# Altium PCB main_board4.PcbDoc
Units mm, origin at the board's own origin, x right, y up, seen from the top; angles counter-clockwise.
Board outline 147.7 x 56.39 mm, 2 copper layers (Top Layer, Bottom Layer); 82 components, 65 nets, 336 pads, 51 vias.
Unrouted connection lines stored in the file: 1.
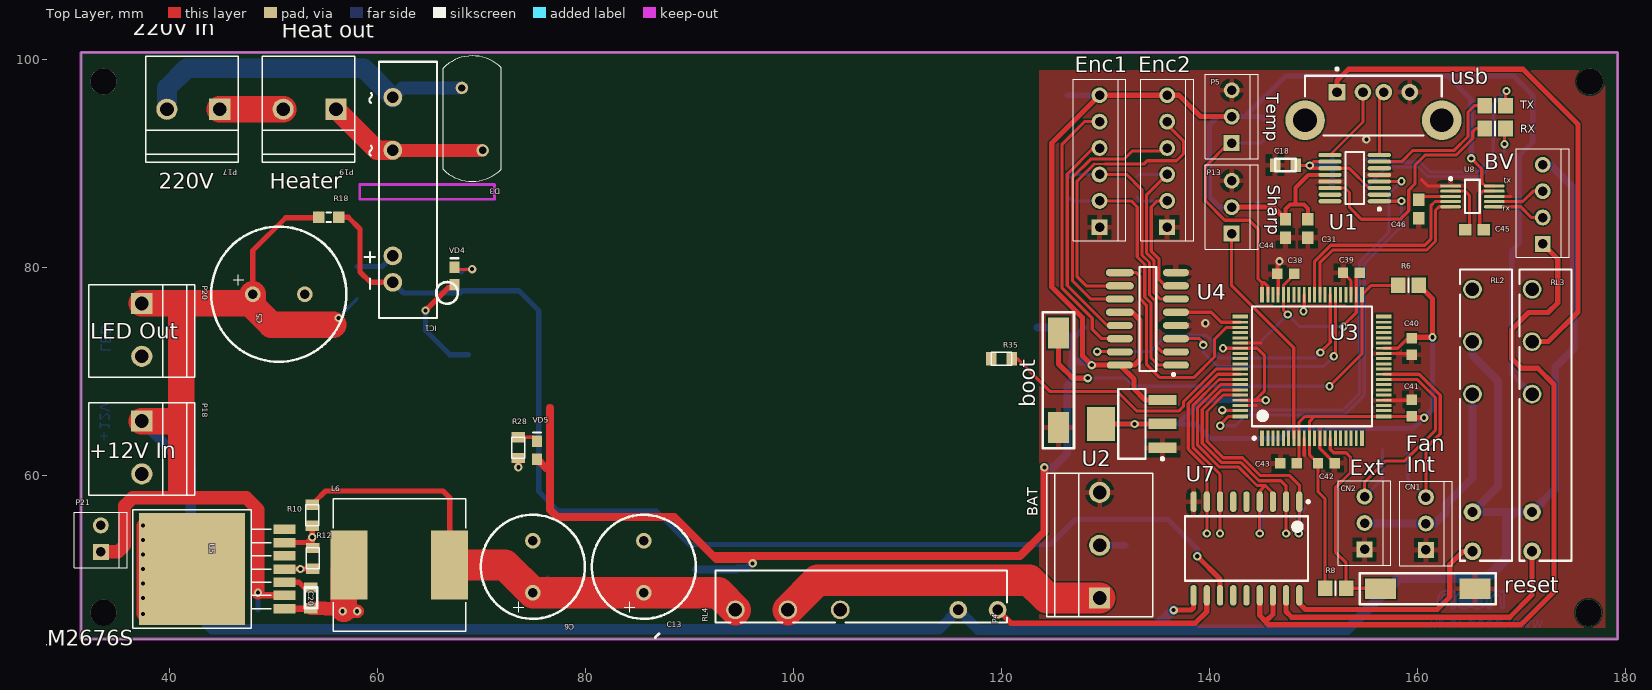
[diagram p0: Top Layer view]
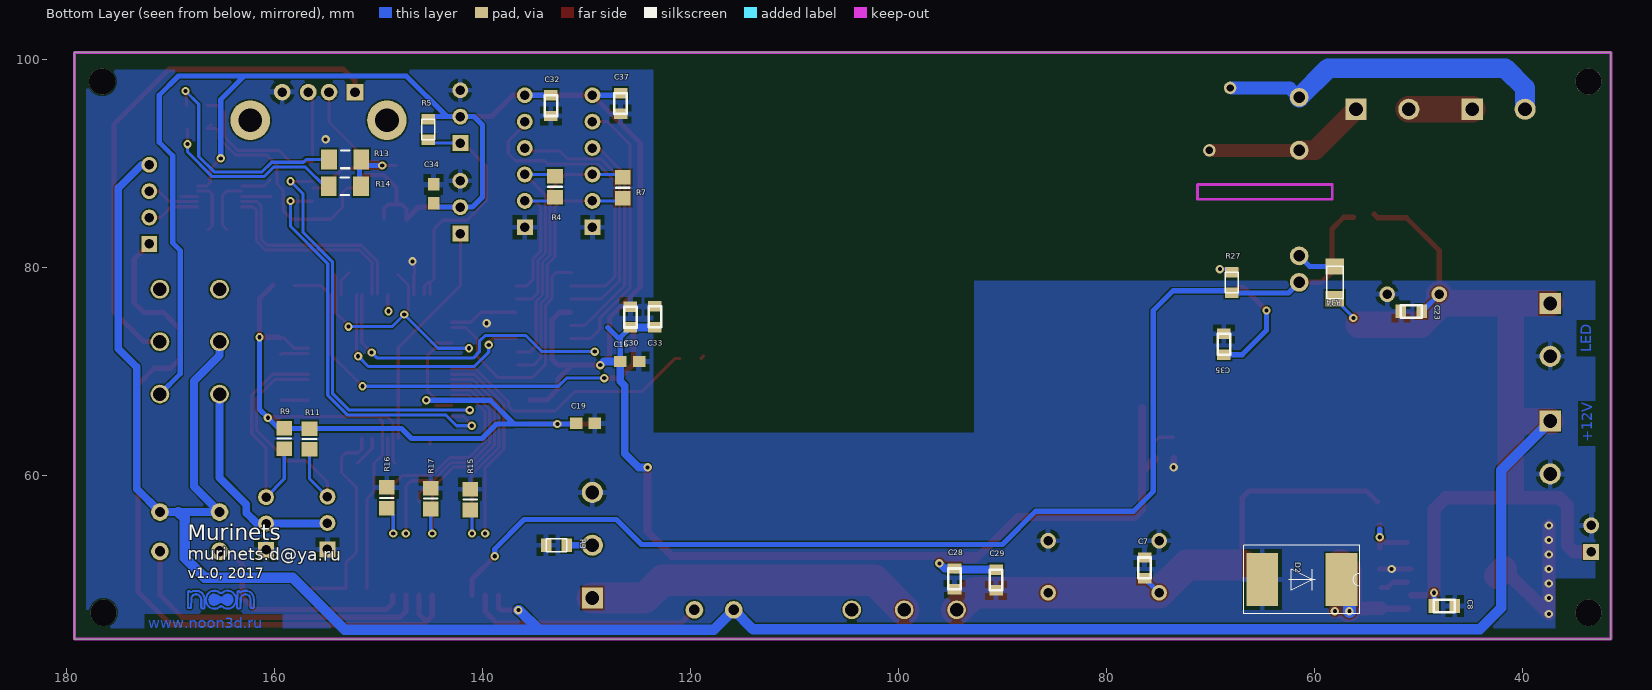
[diagram p1: Bottom Layer view, seen from below]

## Layer stack, top to bottom
Top Solder: solder mask 0.0102, Solder Resist, Dk 3.5
Top Layer: signal copper 0.0356
Dielectric 1: dielectric 0.32, FR-4, Dk 4.8
Bottom Layer: signal copper 0.0356
Bottom Solder: solder mask 0.0102, Solder Resist, Dk 3.5

## Board outline
31.496,44.323 31.496,100.711 179.197,100.711 179.197,44.323

## Design rules (kind name [scope] priority, off if disabled: settings)
Clearance [All] p1: gap=0.15 ignorepadtopadclearanceinfootprint=FALSE
PolygonConnect [IsPad And InNet('GND')] p1: connectstyle=Relief reliefconductorwidth=0.508 reliefentries=4 polygonreliefangle="90 Angle" airgapwidth=0.381
PolygonConnect ViaCon [IsVia And InNet('GND')] p2: connectstyle=Direct reliefconductorwidth=0.508 reliefentries=4 polygonreliefangle="90 Angle" airgapwidth=0.381
RoutingVias [All] p1: holewidth=0.6 width=1.15 viastyle="Through Hole" minholewidth=0.6 minwidth=1.15 maxholewidth=0.8 maxwidth=1.3 useviatemplates=TRUE viatemplateguid#1={5399A165-F482-44B8-8C10-10F574C55520} viatemplatename#1=v08h40
SolderMaskExpansion [All] p1: expansion=0.102
Width [All] p1: maxlimit=5.81 minlimit=0.2 preferedwidth=0.305 minimp=50.000000 maximp=50.000000 favimp=50.000000
30 further rules are at their usual default settings.

## Components (designator, comment, footprint, x,y, rotation, side; value= is the part's Value field where it differs from the comment)
boot "chip button" "BUTTON SMD" 125.45,67.65 r90 top
BV "wf-4" WF-4 172,82.3 r90 top
C5 "1000uF" CAP+_D13_dip 48.006,77.47 r90 top
C6 "470uF" CAP+_D10_dip 74.93,48.768 r180 top
C7 "0,1 мк" Cap_0805 76.327,50.165 r90 bottom
C8 "0.47" Cap_0805 48.514,47.498 r180 bottom
C13 "470uF" CAP+_D10_dip 85.598,48.768 r180 top
C16 "Cap" CAPC1608M 125.825,71 r180 bottom value=1uF
C18 "0.1" Cap_0805 148.275,89.875 r180 top
C19 "Cap" CAPC1608M 130.075,65.05 r180 bottom value=1uF
C20 "10n" Cap_0805 53.594,49.276 r270 top
C23 "0,1 мк" Cap_0805 51.689,75.819 r180 bottom
C28 "0.1" Cap_0805 94.6,49.1 r90 bottom
C29 "0.1" Cap_0805 90.6,49 r90 bottom
C30 "0.1" Cap_0805 125.75,76.275 r270 bottom
C31 "0.1" CAPC1608M 149.425,83.775 r90 top
C32 "0.1" Cap_0805 133.4,94.6 r90 bottom
C33 "0.1" Cap_0805 123.4,76.3 r270 bottom
C34 "Cap" CAPC1608M 144.675,87.125 r90 bottom value=1uF
C35 "0.1" Cap_0805 68.707,73.66 r270 bottom
C37 "0.1" Cap_0805 126.7,94.8 r90 bottom
C38 "p" CAPC1608N 147.3,79.425 r0 top value=100nF
C39 "p" CAPC1608N 153.6,79.525 r0 top value=100nF
C40 "p" CAPC1608N 159.4,72.45 r90 top value=100nF
C41 "p" CAPC1608N 159.4,66.525 r270 top value=100nF
C42 "p" CAPC1608N 151.2,61.225 r180 top value=100nF
C43 "p" CAPC1608N 147.575,61.225 r0 top value=100nF
C44 "0.1" CAPC1608M 147.275,83.775 r90 top
C45 "0.1" CAPC1608M 165.45,83.675 r180 top
C46 "p" CAPC1608M 160.075,85.65 r270 top value=100nF
CN1 "3-pin" wf-3 160.775,52.885 r90 top
CN2 "3-pin" wf-3 154.875,52.935 r90 top
D2 "MBRS330" MBRS3 65.024,50.038 r180 bottom
D3 "390V" Var_130 68.1,97.3 r270 top
Enc1 "6-pin" WF-6 129.4,83.9 r90 top (schematic designator enc1)
Enc2 "6-pin" WF-6 135.9,83.9 r90 top (schematic designator enc2)
IC1 "S202T" CRYDOM_LC 61.468,87.503 r270 top
L6 "DR-PM12651S" PM12651 62.103,51.435 r0 top value=22uH
P4 "MPW3" "MPW-3 - duplicate" 129.413,48.26 r90 top
P5 "WF-3" WF-3 142.1,92 r90 top
P13 "WF-3" WF-3 142.1,83.3 r90 top
P17 "MPW-2" MPW-2 44.831,95.25 r180 top
P18 "MPW-2" MPW-2 37.338,65.278 r270 top
P19 "MPW-2" MPW-2 56.007,95.25 r180 top
P20 "MPW-2" MPW-2 37.338,76.581 r270 top
P21 "WF2" WF2 33.401,52.705 r0 top
R3 "2k4" Res_0805 133.858,53.34 r180 bottom
R4 "100" RESC2012M 133,87.8 r90 bottom
R5 "10k" Res_0805 145.2,92.3 r90 bottom
R6 "510" RESC2012M 159.1,78.325 r0 top
R7 "100" RESC2012M 126.5,87.7 r90 bottom
R8 "510" RESC2012M 152.1,49.2 r180 top
R9 "100" RESC2012M 159.025,63.6 r90 bottom
R10 "2k4" Res_0805 53.725,55.225 r90 top
R11 "100" RESC2012M 156.6,63.55 r90 bottom
R12 "1k" Res_0805 53.75,51.075 r90 top
R13 "Res2" RESC3216M 153.175,90.425 r0 bottom value=1K
R14 "Res2" RESC3216M 153.2,87.85 r0 bottom value=1K
R15 "10k" RESC2012M 141.15,57.725 r90 bottom
R16 "10k" RESC2012M 149.175,57.9 r90 bottom
R17 "10k" RESC2012M 144.95,57.825 r90 bottom
R18 "4.7K" RESC1608M 55.3,84.875 r180 top
R27 "510" Res_0805 67.945,77.597 r90 bottom
R28 "510" Res_0805 73.533,61.722 r90 top
R34 "510" Res_1206 58.039,80.137 r270 bottom
R35 "10k" Res_0805 120.975,71.275 r180 top
reset "chip button" "BUTTON SMD" 162.5,49.15 r180 top
RL2 "5VDC" REL_TYCO-SCHRACK_SNR 165.25,65.85 r90 top
RL3 "5VDC" REL_TYCO-SCHRACK_SNR 170.975,65.85 r90 top
RL4 "5VDC" REL_TYCO-SCHRACK_SNR 106.5,47.125 r180 top
RX "led" RESC2012M 167.425,93.4 r0 top
TX "led" RESC2012M 167.425,95.6 r0 top
U1 "FT230X" SOP635P600-16N 153.925,88.625 r180 top
U2 "ADP3338" SOT223-4M 132.5,65 r180 top
U3 "LPC1758FBD80" SOT315-1_V 149.825,70.525 r90 top
U4 "SN65C1167" "SOIC127P600-16M - INCREASE WIDTH" 134.05,75.1 r180 top
U5 "LM2678S" TO263-7 42.164,51.054 r0 top
U7 "ULN2803A" SOIC127P1030-18L 143.525,53.025 r270 top
U8 "ADM101E" TSSOP50P490-10AM 165.25,86.875 r0 top
usb "USBB-1J" USB2.5-2V4A 155.725,92.71 r270 top
VD4 "*" CD1608-0603 67.4,79.225 r90 top
VD5 "*" CD1608-0603 75.325,62.475 r90 top

## Footprints (in the part's own frame and the unit in brackets; to place one, negate y for a bottom-side part, rotate by r counter-clockwise, add the part's x,y. Pads: shape width x height; smd on the part's side, far side on the other; paste and mask are expansions set on the pad)
"BUTTON SMD" [mm]
  rect 3x2 smd: 1(6.1,0) 2(-3,0)
  silkscreen extent -5,-1.5 8.1,1.5, body extent -5,-1.5 8.1,1.5, height 5
CAP+_D10_dip [mm]
  round 1.5 hole 0.9: 1(0,0) 2(0,-5)
  silkscreen extent -5,-7.5 5,2.5
CAP+_D13_dip [mm]
  round 1.5 hole 0.9: 1(0,0) 2(0,-5)
  silkscreen extent -6.5,-9 6.5,4
Cap_0805 [mm] "Type 0805"
  rect 1x1.3 smd: 1(0,0) 2(2,0)
  silkscreen extent 0,-0.6 2,0.6
CAPC1608M [mm] "Chip Capacitor, Body 1.6x0.8mm, IPC Low Density"
  rect 1.2x1.1 smd: 1(-0.9,0) 2(0.9,0)
  body extent -0.87,-0.48 0.87,0.48, height 0.85
CAPC1608N [mm] "Chip Capacitor, Body 1.6x0.8mm, IPC Medium Density"
  rect 1x1 smd: 1(-0.8,0) 2(0.8,0)
  body extent -0.87,-0.48 0.87,0.48, height 0.85
CD1608-0603 [mm] "Chip Diode; Body 1.6 x 0.8 mm (LxW typ)"
  rect 1.1x1 smd: 1(-0.85,0) 2(0.85,0)
  silkscreen extent 1.7,-0.4 1.7,0.4
CRYDOM_LC [mm] "CRYDOM LC Serie, 4 Leads, Body 24.1mm x 5.1mm, Mini-SIP SSR (Solid State Relay)"
  round 1.8 hole 1.1: 1(-8.89,0) 2(-3.81,0) 3(6.35,0) 4(8.89,0)
  silkscreen extent -12.32,-2.7 12.32,4.25, body extent -12.31,-1.33 12.32,4.25, height 13.2
MBRS3 [mil]
  rect 120x200 smd: 1(0,0) 2(300,0)
  silkscreen extent -70,-130 370,130
MPW-2 [mil]
  rect 80x80 hole 52: 1(0,0)
  round 80 hole 52: 2(200,0)
  silkscreen extent -70,-200 280,200
"MPW-3 - duplicate" [mil]
  rect 80x80 hole 52: 1(0,0)
  round 80 hole 52: 2(200,0) 3(400,0)
  silkscreen extent -70,-200 472,200
PM12651 [mil]
  rect 140x260 smd: 1(-190,0) 2(190,0)
  silkscreen extent -250,-250 250,250
REL_TYCO-SCHRACK_SNR [mm] "5 Leads, Body 28.0 x 5mm, Slim PCB Relay SNR Serie"
  round 1.8 hole 1.3: 11(7.06,0) 12(2.02,0) 14(12.1,0)
  round 1.7 hole 1: A1(-13.1,0) A2(-9.32,0)
  silkscreen extent -14,-3.8 14,1.2, body extent -14,-3.8 14,1.2, height 15
Res_0805 [mm] "Type 0805"
  rect 1x1.3 smd: 1(0,0) 2(2,0)
  silkscreen extent 0,-0.63 2,0.63
Res_1206 [mm] "Type 1206"
  rect 1.5x1.8 smd: 1(0,0) 2(3.1,0)
  silkscreen extent 0,-0.8 3.1,0.8
RESC1608M [mm] "Chip Resistor, Body 1.6x0.8mm, IPC Low Density"
  rect 1.1x1.1 smd: 1(-0.95,0) 2(0.95,0)
  silkscreen extent -0.2,-0.45 0.2,0.45, body extent -0.85,-0.48 0.85,0.48, height 0.6
RESC2012M [mm] "Chip Resistor, Body 2.0x1.3mm, IPC Low Density"
  rect 1.4x1.5 smd: 1(-1,0) 2(1,0)
  silkscreen extent 0,-0.65 0,0.65, body extent -1.07,-0.7 1.07,0.7, height 0.65
RESC3216M [mm] "Chip Resistor, Body 3.2x1.6mm, IPC Low Density"
  rect 1.5x1.9 smd: 1(-1.55,0) 2(1.55,0)
  silkscreen extent -0.4,-0.85 0.4,0.85, body extent -1.68,-0.87 1.68,0.87, height 0.71
"SOIC127P600-16M - INCREASE WIDTH" [mm] "SOIC, 16-Leads, Body 9.9x3.9mm, Pitch 1.27mm, IPC Low Density"
  oval 2.5x0.7 smd: 1(-2.7,4.445) 2(-2.7,3.175) 3(-2.7,1.905) 4(-2.7,0.635) 5(-2.7,-0.635) 6(-2.7,-1.905) 7(-2.7,-3.175) 8(-2.7,-4.445) 13(2.7,0.635) 14(2.7,1.905) 15(2.7,3.175) 16(2.7,4.445)
  oval 2.7x0.7 smd: 9(2.7,-4.445) 10(2.7,-3.175) 11(2.7,-1.905) 12(2.7,-0.635)
  silkscreen extent -2.58,-5 0.8,5.47, body extent -2,-5 2,5, height 1.75
SOIC127P1030-18L [mm] "SOIC, 18-Leads, Body 11.6x7.5mm, Pitch 1.27mm, IPC High Density"
  oval 2x0.6 smd: 1(-4.5,5.08) 2(-4.5,3.81) 3(-4.5,2.54) 4(-4.5,1.27) 5(-4.5,0) 6(-4.5,-1.27) 7(-4.5,-2.54) 8(-4.5,-3.81) 9(-4.5,-5.08) 10(4.5,-5.08) 11(4.5,-3.81) 12(4.5,-2.54) 13(4.5,-1.27) 14(4.5,0) 15(4.5,1.27) 16(4.5,2.54) 17(4.5,3.81) 18(4.5,5.08)
  silkscreen extent -4.62,-5.9 3.1,6.06, body extent -3.8,-5.95 3.8,5.95, height 2.65
SOP635P600-16N [mm] "SOP, 16-Leads, Body 4.9x3.9mm, Pitch 0.635mm, IPC Medium Density"
  oval 2.25x0.4 smd: 1(-2.375,2.222) 2(-2.375,1.587) 3(-2.375,0.952) 4(-2.375,0.317) 5(-2.375,-0.318) 6(-2.375,-0.953) 7(-2.375,-1.588) 8(-2.375,-2.223) 9(2.375,-2.222) 10(2.375,-1.587) 11(2.375,-0.952) 12(2.375,-0.317) 13(2.375,0.318) 14(2.375,0.953) 15(2.375,1.588) 16(2.375,2.223)
  silkscreen extent -2.5,-2.5 0.9,3.1, body extent -1.99,-2.5 1.99,2.5, height 1.76
SOT223-4M [mm] "SOT223, 4-Leads, Body 6.5x3.5mm, Pitch 2.3mm, Lead Span 7mm, IPC Low Density"
  rect 2.7x1 smd: 1(-2.95,2.3) 2(-2.95,0) 3(-2.95,-2.3)
  rect 2.7x3.3 smd: 4(2.95,0)
  silkscreen extent -3.08,-3.35 1.3,3.47, body extent -1.85,-3.35 1.85,3.35, height 1.8
SOT315-1_V [mm] "Thin QFP, 80-Leads, Body 12x12mm, Pitch 0.5mm, NXP Recommended"
  rect 1.5x0.4 smd: 1(-6.9,4.81) 20(-6.9,-4.81) 41(6.9,-4.81) 60(6.9,4.81)
  rect 1.5x0.28 smd: 2(-6.9,4.25) 3(-6.9,3.75) 4(-6.9,3.25) 5(-6.9,2.75) 6(-6.9,2.25) 7(-6.9,1.75) 8(-6.9,1.25) 9(-6.9,0.75) 10(-6.9,0.25) 11(-6.9,-0.25) 12(-6.9,-0.75) 13(-6.9,-1.25) 14(-6.9,-1.75) 15(-6.9,-2.25) 16(-6.9,-2.75) 17(-6.9,-3.25) 18(-6.9,-3.75) 19(-6.9,-4.25) 42(6.9,-4.25) 43(6.9,-3.75) 44(6.9,-3.25) 45(6.9,-2.75) 46(6.9,-2.25) 47(6.9,-1.75) 48(6.9,-1.25) 49(6.9,-0.75) 50(6.9,-0.25) 51(6.9,0.25) 52(6.9,0.75) 53(6.9,1.25) 54(6.9,1.75) 55(6.9,2.25) 56(6.9,2.75) 57(6.9,3.25) 58(6.9,3.75) 59(6.9,4.25)
  rect 0.4x1.5 smd: 21(-4.81,-6.9) 40(4.81,-6.9) 61(4.81,6.9) 80(-4.81,6.9)
  rect 0.28x1.5 smd: 22(-4.25,-6.9) 23(-3.75,-6.9) 24(-3.25,-6.9) 25(-2.75,-6.9) 26(-2.25,-6.9) 27(-1.75,-6.9) 28(-1.25,-6.9) 29(-0.75,-6.9) 30(-0.25,-6.9) 31(0.25,-6.9) 32(0.75,-6.9) 33(1.25,-6.9) 34(1.75,-6.9) 35(2.25,-6.9) 36(2.75,-6.9) 37(3.25,-6.9) 38(3.75,-6.9) 39(4.25,-6.9) 62(4.25,6.9) 63(3.75,6.9) 64(3.25,6.9) 65(2.75,6.9) 66(2.25,6.9) 67(1.75,6.9) 68(1.25,6.9) 69(0.75,6.9) 70(0.25,6.9) 71(-0.25,6.9) 72(-0.75,6.9) 73(-1.25,6.9) 74(-1.75,6.9) 75(-2.25,6.9) 76(-2.75,6.9) 77(-3.25,6.9) 78(-3.75,6.9) 79(-4.25,6.9)
  silkscreen extent -7.02,-5.75 5.75,5.75, body extent -6,-6 6,6, height 1.6
TO263-7 [mil]
  rect 85x36 smd: 1(350,-150) 2(350,-100) 3(350,-50) 4(350,0) 5(350,50) 6(350,100) 7(350,150)
  rect 400x425 smd: 8(0,0)
  silkscreen extent -225,-225 300,225
TSSOP50P490-10AM [mm] "TSSOP, 10-Leads, Body 3x3mm, Pitch 0.5mm, IPC Low Density"
  oval 2x0.3 smd: 1(-2.1,1) 2(-2.1,0.5) 3(-2.1,0) 4(-2.1,-0.5) 5(-2.1,-1) 6(2.1,-1) 7(2.1,-0.5) 8(2.1,0) 9(2.1,0.5) 10(2.1,1)
  silkscreen extent -2.22,-1.6 0.7,1.82, body extent -1.6,-1.6 1.6,1.6, height 1.1
USB2.5-2V4A [mm] "Connector; USB1.1, Type A, Thru-Hole; 4 Position; Vertical"
  rect 1.6x1.6 hole 0.92: 1(-4.19,-3.5)
  round 1.6 hole 0.92: 2(-4.19,-1) 3(-4.19,1) 4(-4.19,3.5)
  round 3.8 hole 2.3: 5(-1.48,6.57) 6(-1.48,-6.57)
  silkscreen extent -6.53,-6.57 0,6.57, body extent -5.76,-6.57 0,6.57, height 15
Var_130 [mm]
  round 1.2 hole 0.7: 1(0,0) 2(6,2)
  silkscreen extent -3.08,-1.8 8.98,3.8
WF2 [mil]
  rect 60x60 hole 36: 1(0,0)
  round 60 hole 36: 2(0,100)
  silkscreen extent -100,-60 100,150
wf-3 [mil]
  rect 60x60 hole 36: 1(0,0)
  round 60 hole 36: 2(100,0) 3(200,0)
  silkscreen extent -60,-100 260,100, body extent -60,-100 260,100, height 394
WF-3 [mil]
  rect 60x60 hole 36: 1(0,0)
  round 60 hole 36: 2(100,0) 3(200,0)
  silkscreen extent -60,-100 260,100, body extent -60,-100 260,100, height 394
WF-4 [mil]
  rect 60x60 hole 36: 1(0,0)
  round 60 hole 36: 2(100,0) 3(200,0) 4(300,0)
  silkscreen extent -50,-100 360,100, body extent -50,-100 360,100, height 394
WF-6 [mil]
  rect 60x60 hole 36: 1(0,0)
  round 60 hole 36: 2(100,0) 3(200,0) 4(300,0) 5(400,0) 6(500,0)
  silkscreen extent -50,-100 560,100, body extent -50,-100 560,100, height 394

## Part data
BV: library part 4-pin
C5: library part Cap+, "Tantalum and aluminium electrolytic capacitors", ValueSCH="330,0 мк", Voltage=25V
C6 C13: library part Cap+, "Tantalum and aluminium electrolytic capacitors", ValueSCH="470,0 мк", Voltage=16V
C7 C8 C18 C20 C23 C28 C29 C30 C31 C32 C33 C35 C37 C44 C45: library part Cap, "Ceramic capacitors"
  C7 C23: ValueSCH="0,1 мк"
  C8: ValueSCH=0.47
  C18 C28 C29 C30 C31 C32 C33 C35 C37 C44 C45: ValueSCH=0.1
  C20: ValueSCH=10n
C16 C19 C34: "Capacitor", LatestRevisionDate=17-Jul-2002, LatestRevisionNote="Re-released for DXP Platform.", PackageDescription="Radial Cap, Thru-Hole; 2 Leads; 0.3 in Pin Spacing", PackageReference=RAD-0.3, Published=8-Jun-2000, Publisher="Altium Limited"
C38 C39 C40 C41 C42 C43 C46: library part Cap, "Capacitor", LatestRevisionDate=17-Jul-2002, LatestRevisionNote="Re-released for DXP Platform.", PackageDescription="Radial Cap, Thru-Hole; 2 Leads; 0.3 in Pin Spacing", PackageReference=RAD-0.3, Published=8-Jun-2000, Publisher="Altium Limited"
D2: library part MBRS360T3
D3: library part "Varistor 430V", "Varistor", Device=390V
IC1: library part LC242, "Opto Relay x1 Type1", Manufacturer=CRYDOM, Author="CERN DEM JLC", ComponentHeight=12.7mm, Component Type=Standard, CreateDate=12.03.2014, Device=S202T, HelpURL=\\cern.ch\dfs\Applications\Altium\Datasheets\LC242.pdf, LatestRevisionDate=12.03.2014, Manufacturer Part Number=LC242, Mounted=Yes, PackageDescription="CRYDOM LC Serie, 4 Leads, Body 24.1mm x 5.1mm, Mini-SIP SSR (Solid State Relay)", Part Description="4-10VDC Control Voltage, 12-280VAC Operating Voltage, 2A Operating Current, Mini-SIP Solid State Relay(SSR), LC Serie", Part Number=LC242, Pin Count=4, SMD=No, Socket=No, Table=Optocouplers
R3 R4 R5 R6 R7 R8 R9 R10 R11 R12 R27 R28 R34 R35: library part Res, "Ceramic resisors"
  R3 R10: ValueSCH=2k4
  R4 R7 R9 R11: ValueSCH=100
  R5 R35: ValueSCH=10k
  R6 R8 R27 R28 R34: ValueSCH=510
  R12: ValueSCH=1k
R13 R14: "Resistor", LatestRevisionDate=17-Jul-2002, LatestRevisionNote="Re-released for DXP Platform.", PackageDescription="Axial Device, Thru-Hole; 2 Leads; 0.4 in Pin Spacing", PackageReference=AXIAL-0.4, Published=8-Jun-2000, Publisher="Altium Limited"
R15 R16 R17 R18: library part Res, "Ceramic resisors", ValueSCH=510
RL2 RL3 RL4: library part REL_TYCO-SCHRACK_V23092-A1005-A301, "SNR Slim PCB Relay Form C (1 CO Contact)", Manufacturer="TYCO SCHRACK", Manufacturer Part Number="V23092-A1005-A301 or 0-1393236-2", Author="CERN DEM JLC", ComponentHeight=15mm, Component Type=Standard, CreateDate=28.01.2009, HelpURL=\\cern.ch\dfs\Applications\Altium\Datasheets\REL_TYCO-SCHRACK_SNR.pdf, LatestRevisionDate=28.01.2009, Mounted=Yes, PackageDescription="5 Leads, Body 28.0 x 5mm, Slim PCB Relay SNR Serie", Part Description="SPDT General Purpose  Slim PCB Relay, SNR Serie", Part Number=REL_TYCO-SCHRACK_V23092-A1005-A301, Pin Count=5, SMD=No, Socket=No, Status=None, Table=Relays
RX TX: library part "chip led", "chip led"
U2: library part ADP3339, "ADP3339AKCZ-3.3-R7"
U3: "32-bit ARM Cortex-M3 MCU, 512 kB Flash, 64 kB SRAM, 100 MHz, USB 2.0 Device/Host/OTG, Ethernet, CAN, 12-Bit ADC, DAC, I2S, 80-Pin LQFP", ADC channels=6, CAN=2, Code_IEC=136E15, Code_JEDEC=MS-026, ComponentLink1Description="Manufacturer URL", ComponentLink1URL=http://www.nxp.com/, ComponentLink2Description=Datasheet, ComponentLink2URL=http://www.nxp.com/documents/data_sheet/LPC1759_58_56_54_52_51.pdf, DatasheetVersion="Rev. 7, Mar-2011", Flash="512 kB", fmax="100 MHz", GPIOs=52, PackageDescription="LQFP80: Plastic Low Profile Quad Flat Package; 80 Leads; Body 12 x 12 x 1.4 mm", PackageReference=SOT315-1, PackageVersion=Feb-2003, PartNumber=LPC1758FBD80, PLL=Y, PWM=6, SPI=1, SRAM="64 kB", SSP=2, Timers=4, UART=4, USB=1, VDD (max)="3.6 V", VDD (min)="2.4 V", VDD (typ)="3.3 V"
U4: "RS-422 Dual Differential Drivers and Receivers"
U5: library part LM2676S
U7: "EIGHT DARLINGTON ARRAYS"
U8: "Tiny RS-232 Transceiver"
VD4 VD5: library part LED, "LED"
usb: url=http://www.brownbear.ru/components/usbb-1j.html

## Free pads (board coordinates)
  round 2.524 hole 2.54 unplated: 0(33.655,46.863) 0(33.655,97.917) 0(176.403,46.863) 0(176.53,97.917)

## Via types
v1: diameter 0.8, hole 0.4, Top Layer to Bottom Layer, 51 vias

## Nets (pads, with @x,y where several pads share a name; then routed paths per layer and width w, separated by ;. In a path a pad name is that pad's centre, name@x,y a point inside that pad or via, vN(x,y) a via of type N, cw(c..) or ccw(c..) an arc to the next point about the centre after c; other vN are vias at no path point)
3V3_FTDI: C18.1 R13.1 R14.1 U1.3 U1.10 U1.11 | length 16.1
  Top Layer w0.3: C18.1@148.275,89.825 148.3,89.85 v1(149.6,89.85) 149.962,90.212 U1.10 ; v1@149.6,89.577 U1.11 153.396,89.577 155.301,87.672 U1.3
  Bottom Layer w0.5: v1(149.6,89.85) R13.1@151.8,89.85 ; R14.1 151.8,88 R13.1@151.8,89.85 ; R13.1@151.8,90.425 R13.1@151.8,89.85 ; R13.1@152.125,89.85 R13.1@151.8,89.85
+3.3: C19.1 C38.2 C39.2 C40.2 C41.2 C42.2 C43.2 R6.2 R8.2 R9.2 R11.2 U2.2 U2.4 U3.8 U3.10 U3.21 U3.34 U3.42 U3.56 U3.67 U3.77 | length 133.8
  Top Layer w0.3: v1(141.275,72.275) U3.67 144.55,72.275 145.275,71.55 145.275,68.2 144.35,67.275 ; U3.77 144.35,67.275 ; v1(145.375,67.275) 144.35,67.275 ; v1(147.5,75.525) 147.075,75.95 U3.56 147.075,78.3 148.1,79.325 C38.2 ; C43.2 148.575,61.425 U3.8 148.575,65.15 149.14,65.715 150.065,65.715 ; R8.2 151.075,49.225 151.075,57.8 150.4,58.475 C42.2 149.575,62.05 U3.10 149.575,65.225 150.065,65.715 ; v1(152.85,74.35) 152.85,74.475 154.075,75.7 U3.42 154.075,79.2 C39.2 ; U3.34 158.05,72.275 159.025,73.25 C40.2 ; C41.2@159.39,65.715 U3.21 150.065,65.715
  Top Layer w0.5: U2.4 v1(132.775,65) U2.2 ; C41.2 159.527,65.598 v1(160.6,65.598) ; C40.2 159.475,73.325 v1(161.4,73.325) 161.4,77.025 R6.2
  Bottom Layer w0.3: v1(141.275,72.275) 144.25,72.275 v1(147.5,75.525) 148.675,74.35 v1(152.85,74.35)
  Bottom Layer w0.5: C19.1 131.025,65 v1(132.775,65) 136.95,65 ; v1(145.375,67.275) 139.225,67.275 136.95,65 ; v1(161.4,73.325) 161.4,66.398 v1(160.6,65.598) 159.602,64.6 R9.2 158.975,64.55 R11.2 147.75,64.55 146.8,63.6 140.025,63.6 138.625,65 136.95,65
+5: C16.1 C28.2 C29.2 C30.2 C31.2 C32.2 C33.2 C34.1 C35.2 C37.2 C44.2 Enc1.6 Enc2.6 P5.2 P13.2 R5.2 RL3.12 U1.12 U2.3 U4.12 U4.16 U8.10 VD4.1 VD5.1 | length 282.4
  Top Layer w0.3: C31.2 C31.2@149.425,85 ; v1(165.125,90.525) 166.137,89.513 166.137,88.187 166.45,87.875 U8.10
  Top Layer w0.4: C44.2 147.275,85.675 147.7,86.1 148.15,86.1 ; C31.2@149.425,85 149.425,85.725 149.05,86.1 148.15,86.1 ; U1.12 149.467,88.942 148.225,87.7 148.225,86.175 148.15,86.1
  Top Layer w0.5: U4.12@131.5,75.735 132.565,75.735 133.3,75 133.3,71.2 132.755,70.655 U4.16 ; U2.3 133.775,67.3 132.7,68.375 132.7,69.305 U4.16 ; P13.2 146.11,85.84 C44.2 ; P5.2 139.11,94.54 137.05,96.6 Enc2.6 Enc1.6 124.8,92 124.8,78.15 127.75,75.2 127.75,71.55 v1(128.645,70.655) U4.16
  Top Layer w0.508: v1(64.6,75.9) 66.805,78.105 VD4.1@67.31,78.105
  Top Layer w0.75: VD5.1 76.2,60.75 76.581,60.75 ; 76.581,66.548 76.581,60.75 ; v1(96.05,51.6) 96.05,52 92.575,52 92.275,52.3 ; v1(124.1,60.825) 124.1,54.65 121.75,52.3 92.275,52.3 ; 76.581,60.75 76.581,56.75 77.281,56.05 88.525,56.05 92.275,52.3
  Bottom Layer w0.3: R5.2 R5.2@145.275,94.3
  Bottom Layer w0.5: C30.2 126.725,73.3 126.725,73.075 ; C37.2@126.3,96.6 Enc1.6 ; C16.1 126.725,73.075 ; 127.925,74.275 126.725,73.075 ; C32.2 Enc2.6 ; C34.1 144.29,85.84 P13.2 140.935,85.84 139.975,86.8 139.975,93.725 140.79,94.54 P5.2 143.39,94.54 ; R5.2 144.96,94.54 143.39,94.54 ; v1(165.125,90.525) 165.125,96.2 162.875,98.45 ; RL3.12 169.025,69.82 169.025,81.675 169.75,82.4 169.75,90.775 171.05,92.075 171.05,96.6 169.2,98.45 162.875,98.45 ; 143.39,94.54 147.3,98.45 162.875,98.45
  Bottom Layer w0.508: v1(64.6,75.9) 64.6,74 66.94,71.66 C35.2
  Bottom Layer w0.75: C29.2 94.5,51 C28.2 95.55,51.1 v1(96.05,51.6) ; C33.2@123.425,74.275 C30.2 ; v1(124.1,60.825) 124.975,60.825 126.3,62.15 126.3,68.675 126.725,69.1 C16.1 128.3,71 v1(128.645,70.655)
+12: BV.4 C5.1 C8.1 C23.2 P18.1 P20.1 P21.1 R18.2 R34.2 RL2.11 RL2.A2 RL3.A2 RL4.A2 U5.2 U7.10 | length 317.1
  Top Layer w0.5: C5.1 48.006,81.656 51.175,84.825 53.925,84.825 R18.2@54.25,85.15 ; v1(136.525,47.1) 138.225,47.1 138.445,47.32 U7.10
  Top Layer w0.635: v1@48.26,49.022 v1(48.514,48.768) 48.768,48.514 U5.2@50.673,48.514
  Top Layer w0.75: 54.65,74.15 55.753,74.15
  Top Layer w1.27: P21.1 35.052,52.705 35.687,53.34 35.687,57.15 36.449,57.912 42.037,57.912 ; 41.148,58.801 42.037,57.912 ; v1(48.514,48.768) 48.514,56.769 47.371,57.912 42.037,57.912 ; 55.753,74.15 55.753,74.549
  Top Layer w2.54: P18.1 41.021,65.278 41.148,65.405 ; P20.1 41.275,76.581 ; 41.148,58.801 41.148,65.405 ; C5.1 48.006,76.581 ; 55.753,74.549 49.784,74.549 48.006,76.327 48.006,76.581 ; 41.148,65.405 41.148,76.454 41.275,76.581 ; 41.275,76.581 48.006,76.581
  Bottom Layer w0.305: v1(56.261,75.184) 56.261,75.259 R34.2
  Bottom Layer w0.508: C5.1 49.657,75.819 C23.2 ; C8.1@48.514,47.117 C8.1 v1(48.514,48.768)
  Bottom Layer w0.75: RL2.11 165.25,71.575 167.7,69.125 167.7,58.98 RL2.A2 169.2,56.53 RL3.A2 173.2,58.755 173.2,70.46 174.982,72.243 174.982,87.668 172.73,89.92 BV.4
  Bottom Layer w1: P18.1 42.05,60.566 42.05,47.325 44.1,45.275 113.97,45.275 RL4.A2 117.745,45.2 134.525,45.2 ; v1(136.525,47.1) 136.425,47.1 134.525,45.2 ; 169.2,56.53 168.6,55.93 168.6,52.15 166.675,50.225 158.225,50.225 153.2,45.2 134.525,45.2
bat_pwr: U3.72 U7.8 | length 19.4
  Top Layer w0.3: v1(139.715,54.475) U7.8 139.715,60.789 137.925,62.579 137.925,66.946 140.754,69.775 U3.72
bat_pwr_gnd: RL4.A1 U7.11 | length 22.7
  Top Layer w0.5: RL4.A1 120.875,45.85 138.6,45.85 139.715,46.965 U7.11
boot: boot.1 R6.1 U3.41 | length 43.9
  Top Layer w0.3: v1(151.5,68.625) 154.635,71.76 U3.41 155.535,78.325 R6.1
  Top Layer w0.5: boot.1 125.45,70.775 126.825,69.4 v1(128.275,69.4)
  Bottom Layer w0.3: v1(128.275,69.4) 131.9,69.4 132.675,68.625 v1(151.5,68.625)
BV_gnd: BV.1 U7.15 U7.16 | length 74.3
  Top Layer w0.5: U7.15 144.795,46.58 145.4,45.975 ; U7.16 146.065,46.71 145.4,46.045 145.4,45.975 ; BV.1 173.45,80.85 173.45,76.625 172.525,75.7 170.65,75.7 169.025,74.075 169.025,71.275 169.95,70.35 171.525,70.35 173.075,68.8 173.075,48.875 169.9,45.7 145.625,45.7 145.4,45.925 145.4,45.975
BV_pwr: R17.1 U3.74 U7.3 U7.4 | length 25.9
  Top Layer w0.3: U3.74 141.027,68.775 138.825,66.573 138.825,62.952 140.927,60.85 142.777,60.85 144.54,59.088 145.337,59.088 ; v1(144.795,54.475) U7.4 144.795,58.545 145.337,59.088 ; U7.3 146.065,58.36 145.337,59.088
  Bottom Layer w0.3: v1(144.795,54.475) 144.95,54.63 R17.1
bv_rs232_rx: BV.2 U8.6 | length 5.1
  Top Layer w0.3: U8.6 169.875,85.875 170.91,84.84 BV.2
bv_rs232_tx: BV.3 U8.7 | length 5.1
  Top Layer w0.3: U8.7 170.075,86.375 171.08,87.38 BV.3
bv_uart_rx: U3.49 U8.5 | length 19.6
  Top Layer w0.3: U3.49 150.575,80.489 151.811,81.725 160.85,81.725 161.7,82.575 161.7,85.525 162.05,85.875 U8.5
bv_uart_tx: U3.50 U8.4 | length 20.5
  Top Layer w0.3: U3.50 150.075,80.625 151.625,82.175 160.664,82.175 161.25,82.761 161.25,85.975 161.65,86.375 U8.4
enc1_data: U3.46 U4.3 | length 23.2
  Top Layer w0.3: U4.3 139.005,73.195 139.375,72.825 v1(139.375,72.6) ; v1(151.925,71.5) 152.075,71.65 U3.46
  Bottom Layer w0.3: v1(139.375,72.6) 139.375,71.9 140.75,70.525 150.95,70.525 v1(151.925,71.5)
enc1_sck: U3.47 U4.15 | length 31.9
  Top Layer w0.3: v1(129.175,71.95) 131.325,71.95 U4.15 ; v1(150.625,71.875) 151.575,72.825 U3.47
  Bottom Layer w0.3: v1(129.175,71.95) 134.25,71.95 135.788,73.488 139.738,73.488 140.275,72.95 140.275,71.925 140.875,71.325 150.075,71.325 v1(150.625,71.875)
enc1in_N: Enc1.2 R7.1 U4.1 | length 24.5
  Top Layer w0.3: Enc1.2 132.435,86.44 133.025,85.85 133.025,81.05 133.75,80.325 133.75,77.207 134.35,76.607 134.35,71.35 135.045,70.655 U4.1@136.6,70.655
  Bottom Layer w0.3: R7.1 126.76,86.44 Enc1.2
enc1in_P: Enc1.3 R7.2 U4.2 | length 25.3
  Top Layer w0.3: Enc1.3 132.02,88.98 133.475,87.525 133.475,81.236 134.2,80.511 134.2,77.394 134.8,76.794 134.8,72.5 135.375,71.925 U4.2@136.6,71.925
  Bottom Layer w0.3: R7.2 126.78,88.98 Enc1.3
enc1out_N: Enc1.4 U4.13 | length 21.6
  Top Layer w0.3: Enc1.4 128.813,91.52 126.3,89.007 126.3,78.3 130.135,74.465 U4.13 U4.13@131.5,74.465
enc1out_P: Enc1.5 U4.14 | length 26.7
  Top Layer w0.3: Enc1.5 127.96,94.06 125.8,91.9 125.8,78.05 128.7,75.15 128.7,74.1 129.605,73.195 U4.14 U4.14@131.5,73.195
enc2_data: U3.62 U4.5 | length 6.6
  Top Layer w0.3: U4.5 140.14,75.735 141.1,74.775 U3.62
enc2_sck: U3.63 U4.9 | length 23.3
  Top Layer w0.3: U4.9 132.93,79.545 133.3,79.175 133.3,77.021 133.9,76.421 133.9,70.75 135.2,69.45 138.45,69.45 140.45,71.45 140.45,73.15 141.575,74.275 U3.63
enc2in_N: Enc2.2 R4.1 U4.7 | length 14
  Top Layer w0.3: Enc2.2 134.965,86.44 134.375,85.85 134.375,81.609 135.1,80.884 135.1,78.9 135.725,78.275 U4.7
  Bottom Layer w0.3: R4.1 133.36,86.44 Enc2.2
enc2in_P: Enc2.3 R4.2 U4.6 | length 17.7
  Top Layer w0.3: Enc2.3@135.9,88.68 135.58,88.68 133.925,87.025 133.925,81.423 134.65,80.698 134.65,77.58 135.225,77.005 U4.6
  Bottom Layer w0.3: R4.2 133.18,88.98 Enc2.3
enc2out_N: Enc2.4 U4.11 | length 25.5
  Top Layer w0.3: U4.11@131.5,77.005 U4.11 128.546,77.005 126.8,78.751 126.8,88.7 128.558,90.458 131.758,90.458 132.52,91.22 Enc2.4@135.9,91.22
enc2out_P: Enc2.5 U4.10 | length 28.6
  Top Layer w0.2: 128.883,89.991 128.892,90 129.925,90
  Top Layer w0.3: 128.883,89.991 127.25,88.358 127.25,79.15 128.125,78.275 U4.10 U4.10@131.5,78.275 ; 129.925,90 133.7,90 134,90.3 136.8,90.3 137.5,91 137.5,92.16 Enc2.5@135.9,93.76
Fan: R16.1 U3.76 U7.1 | length 24.7
  Top Layer w0.3: U3.76 141.3,67.775 139.725,66.2 139.725,63.325 141.3,61.75 143.15,61.75 144.875,60.025 147.7,60.025 148.605,59.12 U7.1 148.605,54.53 v1(148.55,54.475)
  Bottom Layer w0.3: v1(148.55,54.475) 148.55,56.275 R16.1
Fan_12V: CN1.2 CN2.2 RL2.12 | length 20.7
  Bottom Layer w0.75: CN2.2 154.925,55.425 CN1.2 161.65,55.425 162.675,56.45 162.675,57.25 165.25,59.825 RL2.12
Fan_ctrl_gnd: RL2.A1 U7.18 | length 21.2
  Top Layer w0.5: U7.18 148.605,47.745 149.2,47.15 161.863,47.15 163.063,48.35 163.063,51.488 164.325,52.75 RL2.A1@164.6,52.75
FT_CTS: U1.6
FT_RTS: U1.2
FT_RX: U1.4 U3.79 | length 39.8
  Top Layer w0.3: v1(141.2,66.325) 141.25,66.275 U3.79 ; U1.4 158.407,88.307 v1(158.425,88.325)
  Bottom Layer w0.3: v1(141.2,66.325) 152.775,66.325 154.4,67.95 154.4,80.6 157.225,83.425 157.225,87.125 v1(158.425,88.325)
FT_RxLed: RX.1 U1.14 | length 23.7
  Top Layer w0.3: U1.14 153.001,87.672 153.425,87.248 153.425,85.825 154.575,84.675 158.3,84.675 159.125,85.5 159.125,87.475 159.725,88.075 159.725,89.875 160.7,90.85 163.686,90.85 165.275,92.439 165.275,93.1 165.575,93.4 RX.1 RX.1@166.025,93.8
FT_TX: U1.1 U3.80 | length 39.7
  Top Layer w0.3: v1(141,64.825) 141,64.925 141.79,65.715 U3.80 ; U1.1 158.402,86.402 v1(158.425,86.425)
  Bottom Layer w0.3: v1(141,64.825) 142.475,64.825 143.525,65.875 152.961,65.875 154.85,67.764 154.85,80.414 158.425,83.989 v1(158.425,86.425)
FT_TxLed: TX.1 U1.7 | length 13.7
  Top Layer w0.3: U1.7 158.45,90.212 159.538,91.3 163.5,91.3 164.825,92.625 164.825,94.975 165.45,95.6 TX.1
GND: boot.2 C5.2 C6.2 C7.2 C8.2 C13.2 C16.2 C18.2 C19.2 C23.1 C28.1 C29.1 C30.1 C31.1 C32.1 C33.1 C34.2 C35.1 C37.1 C38.1 C39.1 C40.1 C41.1 C42.1 C43.1 C44.1 C46.2 CN1.1 CN2.1 D2.1 Enc1.1 Enc2.1 P4.3 P5.3 P13.3 P18.2 P20.2 P21.2 R3.1 R12.1 R15.2 R16.2 R17.2 R28.1 reset.2 U1.5 U1.13 U2.1 U3.9 U3.12 U3.24 U3.33 U3.43 U3.57 U3.66 U3.78 U4.4 U4.8 U5.4 U5.8 U7.9 U8.1 U8.8 usb.4 | length 43.5
  Top Layer w0.305: U3.78 144.5,66.775 ; U3.66 144.925,72.775 ; U3.57 146.575,79.35 C38.1 146.5,80.425 v1(146.7,80.625) ; 149.075,61.953 U3.9 ; U3.12 150.575,62.65 C42.1 ; C39.1 153.575,78.75 U3.43 ; U3.24 159.35,67.275 C41.1 ; U3.33 159.275,71.775 C40.1 ; 160.35,88.475 160.95,87.875 U8.1 ; U8.8 168.95,86.875
  Top Layer w0.508: U5.4@50.673,51.054 U5.4 v1(52.578,51.054) 53.729,51.054 R12.1
  Top Layer w0.635: v1(73.533,60.833) R28.1
  Top Layer w1.27: v1(37.465,55.245) v1(37.465,53.848) v1(37.465,52.451) v1(37.465,51.054) v1(37.465,49.657) v1(37.465,48.26) v1(37.465,46.736) U5.8@41.783,51.054
  Top Layer w2.54: U5.8@41.783,51.054 U5.8@42.418,50.419
  other v1: 139.575,74.675 155.05,92.35
Heat: R15.1 U3.73 U7.7 | length 21.3
  Top Layer w0.3: v1(140.985,54.475) U7.7 140.985,60.156 138.375,62.766 138.375,66.759 140.891,69.275 U3.73
  Bottom Layer w0.3: v1(140.985,54.475) 140.985,56.56 R15.1
heat_ctrl_gnd: IC1.4 R18.1 R27.1 U7.12 | length 115.9
  Top Layer w0.5: R18.1 57.175,84.875 58.325,83.725 58.325,79.6 59.312,78.613 IC1.4 ; v1(138.8,52.275) 140.985,50.09 U7.12
  Bottom Layer w0.5: IC1.4 62.484,77.597 R27.1 68.148,77.8 73.6,77.8 75.5,75.9 75.5,58.5 77.4,56.6 86.8,56.6 90,53.4 124.7,53.4 127.1,55.8 135.975,55.8 138.8,52.975 v1(138.8,52.275)
Mute: R35.1 U3.71 | length 26
  Top Layer w0.3: R35.1 121.489,71.275 124.664,68.1 131.125,68.1 133,66.225 137,66.225 137.475,66.7 137.475,67.132 140.618,70.275 U3.71
NetC20_1: C20.1 U5.3 | length 2.8
  Top Layer w0.508: U5.3 52.451,49.784 52.959,49.276 C20.1
NetC20_2: C20.2 D2.2 L6.1 U5.1 | length 14.8
  Top Layer w0.635: U5.1 53.562,47.244 C20.2
  Top Layer w1.27: C20.2 54.959,47.276 54.991,47.244 v1@56.642,47.244 ; v1(56.642,46.99) v1(58.039,46.99)
  Top Layer w2.54: v1@56.769,47.244 56.769,50.927 L6.1@57.531,51.689
  Bottom Layer w1.27: v1(56.642,46.99) D2.2@56.642,50.038
NetC45_1: C45.1 U8.9 | length 5.1
  Top Layer w0.3: C45.1 165.95,84.075 165.95,87.075 166.25,87.375 U8.9
NetC45_2: C45.2 U8.2 | length 5.4
  Top Layer w0.3: U8.2 164.55,87.375 164.95,86.975 164.95,84.075 C45.2
NetC46_1: C46.1 U8.3 | length 2.9
  Top Layer w0.3: C46.1@160.25,86.875 U8.3
NetD3_1: D3.1 IC1.1 P17.2 | length 32.5
  Bottom Layer w1.27: IC1.1 62.357,97.282 D3.1@67.945,97.282
  Bottom Layer w1.905: P17.2 39.751,97.282 41.656,99.187 58.674,99.187 IC1.1
NetD3_2: D3.2 IC1.2 P19.1 | length 15.6
  Top Layer w1.27: IC1.2 61.499,91.282 D3.2@69.945,91.282
  Top Layer w1.905: P19.1 59.944,91.313 IC1.2
NetIC1_3: IC1.3 R34.1 | length 3.8
  Bottom Layer w0.508: R34.1 60.452,80.137 IC1.3
NetP4_1: P4.1 RL4.11 | length 31.9
  Top Layer w3: RL4.11 102.29,49.975 122.65,49.975 124.365,48.26 P4.1
NetP4_2: P4.2 R3.2 | length 2.4
  Bottom Layer w0.635: P4.2 R3.2
NetP17_1: P17.1 P19.2 | length 6.1
  Top Layer w2.54: P17.1 P19.2
NetR10_1: R10.1 R12.2 U5.6 | length 6
  Top Layer w0.508: U5.6 53.213,53.594 v1(53.721,54.102) ; R10.1@53.721,55.372 v1(53.721,54.102) ; R12.2 53.721,53.104 v1(53.721,54.102)
  Bottom Layer w0.508: v1(53.721,54.102) 53.721,54.896
NetR13_2: R13.2 TX.2 | length 21.9
  Top Layer w0.3: TX.2 168.425,96.9 v1(168.525,97)
  Bottom Layer w0.3: R13.2 156.925,90.425 157.2,90.15 160.236,90.15 161.161,89.225 165.764,89.225 167.25,90.711 167.25,95.725 v1(168.525,97)
NetR14_2: R14.2 RX.2 | length 18
  Top Layer w0.3: v1(168.325,91.9) 168.325,93.3 RX.2
  Bottom Layer w0.3: R14.2 155.15,87.85 157,89.7 160.05,89.7 160.975,88.775 165.95,88.775 168.325,91.15 v1(168.325,91.9)
NetR27_2: R27.2 VD4.2 | length 3.1
  Top Layer w0.305: VD4.2@67.31,79.855 69.06,79.855 v1(69.088,79.883)
  Bottom Layer w0.305: R27.2 68.04,79.502 68.421,79.883 v1(69.088,79.883)
NetR28_2: R28.2 VD5.2 | length 2
  Top Layer w0.305: R28.2@73.537,63.726 R28.2 74.928,63.722 VD5.2
NetRL3_11: RL3.11 usb.1 | length 50.6
  Top Layer w0.5: usb.1 152.225,98 153.325,99.1 170.1,99.1 175.4,93.8 175.4,75.775 172.535,72.91 RL3.11
NetU1_8: U1.8 usb.3 | length 6.2
  Top Layer w0.3: U1.8 156.3,96.475 usb.3
NetU1_9: U1.9 usb.2 | length 7.4
  Top Layer w0.3: U1.9 154.725,94.022 usb.2
reset: R8.1 reset.1 U3.14 | length 20.3
  Top Layer w0.3: U3.14 151.575,62.55 151.9,62.225 153.1,62.225 153.525,61.8 153.525,60.325 152.075,58.875 152.075,52.675 153.1,51.65 R8.1 156.35,49.2 reset.1
Sharp: P13.1 U3.7 | length 22.2
  Top Layer w0.3: P13.1 142.075,83.275 142.075,78.325 148.075,72.325 U3.7
Tacho_fan1: CN1.3 R9.1 U3.29 | length 22
  Top Layer w0.3: U3.29 160.125,69.775 162.15,67.75 162.15,64.05 160.775,62.675 CN1.3
  Bottom Layer w0.3: R9.1 159.025,59.715 CN1.3
Tacho_fan2: CN2.3 R11.1 U3.28 | length 24.4
  Top Layer w0.3: CN2.3 154.875,59.4 156.925,61.45 158.75,61.45 161.7,64.4 161.7,67.525 159.95,69.275 U3.28
  Bottom Layer w0.3: CN2.3 156.6,59.74 R11.1
Term: P5.1 R5.1 U3.59 U3.60 | length 24.1
  Top Layer w0.3: P5.1 141.825,92 139.6,89.775 139.6,86.425 141.45,84.575 143.8,84.575 144.625,83.75 144.625,78.975 145.015,78.585 ; U3.60 145.015,78.585 ; U3.59 145.575,78.25 145.24,78.585 145.015,78.585
  Bottom Layer w0.3: P5.1 144.9,92 R5.1
usb_pwr: U3.75 U7.2 | length 22
  Top Layer w0.3: U3.75 141.164,68.275 139.275,66.386 139.275,63.139 141.114,61.3 142.964,61.3 144.726,59.538 146.813,59.538 147.335,59.015 U7.2 v1(147.335,54.475)
usb_pwr_gnd: RL3.A1 U7.17 | length 30.5
  Top Layer w0.5: U7.17 147.335,46.965 147.875,46.425 168.825,46.425 170.975,48.575 RL3.A1
VBAT: C6.1 C7.1 C13.1 L6.2 R10.2 RL4.14 | length 51.1
  Top Layer w0.508: R10.2@53.959,57.515 54.991,58.547 66.294,58.547 66.929,57.912 L6.2@66.929,51.689
  Top Layer w3: L6.2 72.263,51.435 C6.1 C13.1 92.757,48.768 RL4.14
  Bottom Layer w0.508: C6.1 C7.1
pads on no net: R35.2 RL2.14 RL3.14 RL4.12 U1.15 U1.16 U3.1 U3.2 U3.3 U3.4 U3.5 U3.6 U3.11 U3.13 U3.15 U3.16 U3.17 U3.18 U3.19 U3.20 U3.22 U3.23 U3.25 U3.26 U3.27 U3.30 U3.31 U3.32 U3.35 U3.36 U3.37 U3.38 U3.39 U3.40 U3.44 U3.45 U3.48 U3.51 U3.52 U3.53 U3.54 U3.55 U3.58 U3.61 U3.64 U3.65 U3.68 U3.69 U3.70 U5.5 U5.7 U7.5 U7.6 U7.13 U7.14 usb.5 usb.6
copper on no net: | length 33.4
  Top Layer w0.3: 145.015,63.04 145.015,63.625 ; v1(149,75.825) 149.075,75.9 149.075,77.425
  Top Layer w0.305: 118.749,71.501 118.975,71.275
  Bottom Layer w0.2: 161.946,47.404 161.95,47.357 162.004,47.302 162.199,47.295 162.242,47.318 162.274,47.384 162.281,48.133 162.313,48.304 162.348,48.382 162.394,48.484 162.453,48.526 162.613,48.601 162.742,48.628 162.855,48.593 162.956,48.55 163.062,48.499 163.124,48.421 163.167,48.312 163.21,48.172 163.244,47.37 163.252,47.331 163.304,47.252 163.476,47.24 163.516,47.252 163.563,47.351 163.523,48.861 163.489,48.927 163.409,48.943 163.34,48.901 163.314,48.855 163.264,48.81 163.222,48.832 163.143,48.867 163.089,48.897 163.032,48.943 162.789,48.962 162.622,48.962 162.573,48.954 162.256,48.822 162.121,48.691 162.064,48.603 161.977,48.402 161.965,48.273 161.946,48.183 161.946,47.404 ; 163.656,48.175 163.66,48.016 163.682,47.917 163.736,47.75 163.808,47.609 163.888,47.48 163.983,47.397 164.078,47.347 164.234,47.267 164.374,47.256 164.534,47.252 164.617,47.252 164.808,47.309 164.899,47.385 165.036,47.454 165.131,47.488 165.218,47.423 165.343,47.343 165.48,47.264 165.705,47.237 165.929,47.248 166.165,47.34 166.305,47.457 166.438,47.64 166.51,47.784 166.564,47.993 166.571,48.149 166.518,48.377 166.434,48.544 166.389,48.65 166.328,48.726 166.225,48.813 166.115,48.882 165.971,48.946 165.686,48.962 165.522,48.95 165.439,48.908 165.363,48.867 165.29,48.821 165.229,48.76 165.157,48.73 165.062,48.734 164.99,48.772 164.903,48.836 164.804,48.897 164.716,48.946 164.545,48.969 164.427,48.965 164.256,48.95 164.116,48.886 163.99,48.81 163.907,48.749 163.846,48.642 163.732,48.487 163.709,48.403 163.675,48.304 163.656,48.175 ; 163.987,48.152 164.009,48.247 164.063,48.361 164.142,48.487 164.226,48.536 164.374,48.612 164.522,48.612 164.663,48.574 164.773,48.502 164.865,48.422 165.009,48.327 165.096,48.327 165.241,48.361 165.347,48.434 165.477,48.51 165.583,48.559 165.72,48.624 165.906,48.589 166.062,48.494 166.138,48.411 166.225,48.247 166.241,48.137 166.233,48.035 166.199,47.932 166.138,47.799 166.058,47.7 165.959,47.64 165.86,47.587 165.731,47.594 165.591,47.632 165.473,47.7 165.389,47.757 165.267,47.845 165.18,47.879 164.99,47.845 164.88,47.799 164.766,47.716 164.667,47.655 164.564,47.602 164.378,47.59 164.264,47.655 164.173,47.727 164.104,47.784 164.047,47.894 164.006,47.959 163.99,48.058 163.987,48.152 ; 166.68,48.179 166.69,47.359 166.705,47.309 166.752,47.266 166.936,47.266 166.972,47.29 166.991,47.323 167.005,47.371 167.006,48.138 167.015,48.222 167.029,48.267 167.055,48.296 167.109,48.363 167.141,48.409 167.216,48.519 167.33,48.586 167.426,48.62 167.472,48.631 167.53,48.627 167.619,48.612 167.708,48.562 167.773,48.531 167.835,48.492 167.889,48.415 167.932,48.326 167.959,48.245 167.963,48.18 167.974,47.389 167.99,47.335 168.032,47.293 168.24,47.293 168.279,47.339 168.295,47.389 168.298,48.867 168.252,48.942 168.138,48.932 168.08,48.853 167.981,48.827 167.861,48.88 167.813,48.937 167.704,48.942 167.615,48.953 167.406,48.953 167.228,48.947 167.108,48.864 167.034,48.838 166.914,48.728 166.762,48.488 166.68,48.179

## Polygon pours and split planes (outlines as drawn)
GND on Top Layer "Top Layer-No Net" (solid, pour order 9): 178,99 178,45.4 123.6,45.4 123.6,45.5 123.6,46.6 123.6,99
GND on Bottom Layer "Top Layer-No Net" (solid, remove dead copper, pour order 6): 33.02,78.74 33.02,50.165 36.83,50.165 36.83,45.339 178.054,45.339 178.054,64.135 178.054,99.06 123.571,99.06 123.571,64.135 92.71,64.135 92.71,78.74

## Keep-outs
Keep-Out Layer:
  lines w0.254: 31.496,44.323 179.197,44.323 179.197,100.711 31.496,100.711 31.496,44.323 ; 58.293,86.614 58.293,88.011 71.247,88.011 71.247,86.614 58.293,86.614

## Other copper
Bottom Layer:
  region: 165.906,48.589 166.062,48.494 166.138,48.411 166.225,48.247 166.241,48.137 166.233,48.035 166.199,47.932 166.138,47.799 166.058,47.7 165.959,47.64 165.86,47.587 165.731,47.594 165.591,47.632 165.473,47.7 165.389,47.757 165.267,47.845 165.18,47.879 164.99,47.845 164.88,47.799 164.766,47.716 164.667,47.655 164.564,47.602 164.378,47.59 164.264,47.655 164.173,47.727 164.104,47.784 164.047,47.894 164.006,47.959 163.99,48.058 163.987,48.152 164.009,48.247 164.063,48.361 164.142,48.487 164.226,48.536 164.374,48.612 164.522,48.612 164.663,48.574 164.773,48.502 164.865,48.422 165.009,48.327 165.096,48.327 165.241,48.361 165.347,48.434 165.477,48.51 165.583,48.559 165.72,48.624
  text "LED" at 33.401,71.882 h1.02 r270
  text "+12V" at 33.274,63.246 h1.02 r270
  text "www.noon3d.ru" at 172.085,45.339 h1.02

## Silkscreen, mask and mechanical layers (free items; w line width, h text height)
Top Overlay:
  circle w0.254: c66.675,77.597 r1.047
  lines w0.254: 86.692,44.45 87.073,44.831
  text "220V In" at 36.449,102.362 h1.52
  text "Heat out" at 50.8,102.108 h1.52
  text "Temp" at 145.025,96.8 h2.02 r270
  text "tx" at 168.25,88.175 h0.52
  text "Sharp" at 145.2,88 h2.02 r270
  text "220V" at 38.989,87.63 h1.52
  text "Heater" at 49.657,87.63 h1.52
  text "rx" at 168.15,85.475 h0.52
  text "LED Out" at 32.4,73.2 h1.52
  text "Fan" at 158.825,62.375 h1.52
  text "+12V In" at 32.3,61.7 h1.52
  text "Int" at 158.95,60.375 h1.52
  text "Ext" at 153.45,60.075 h1.52
  text "BAT" at 123.444,56.134 h1.02 r90
  text "LM2676S" at 27.051,43.688 h1.52
Bottom Overlay:
  text "Murinets" at 168.321,53.809 h1.52
  text "murinets.d@ya.ru" at 168.316,51.965 h1.2 r0.43
  text "v1.0, 2017" at 168.316,50.159 h1